# Altium PCB ui-layout-v1.0.0.PcbDoc
Units mil, origin at the board's own origin, x right, y up, seen from the top; angles counter-clockwise.
Board outline 3110 x 1860 mil, 2 copper layers (Top Layer, Bottom Layer); 35 components, 0 nets, 127 pads, 34 vias.
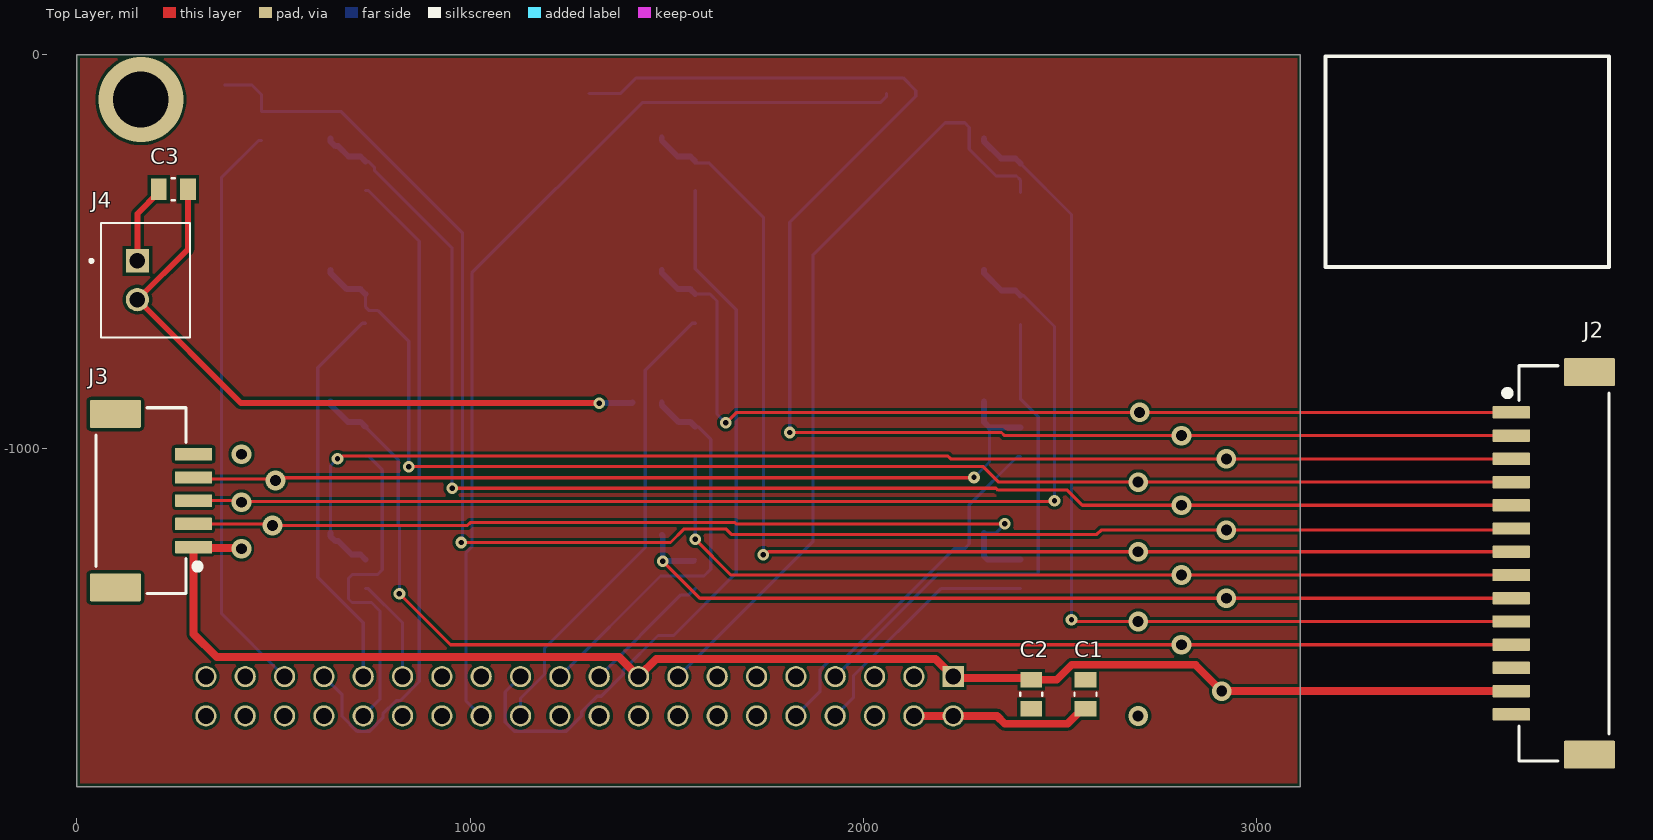
[diagram p0: Top Layer view]
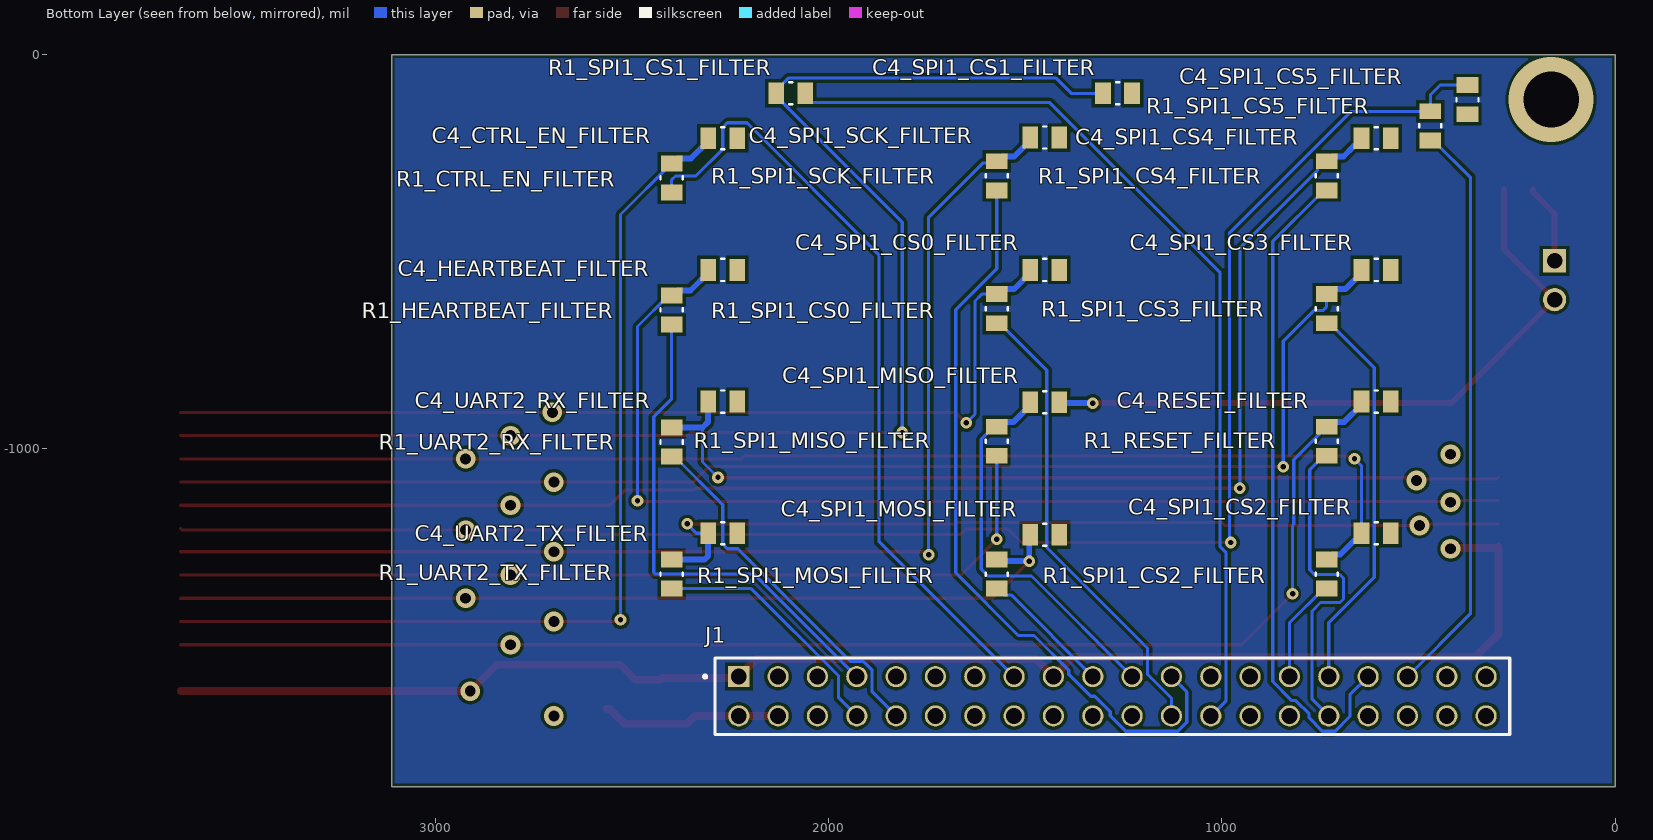
[diagram p1: Bottom Layer view, seen from below]

## Layer stack, top to bottom
Top Solder: solder mask 0.4, Solder Resist, Dk 3.5
Top Layer: signal copper 1.4
Dielectric 1: dielectric 12.6, FR-4, Dk 4.8
Bottom Layer: signal copper 1.4
Bottom Solder: solder mask 0.4, Solder Resist, Dk 3.5

## Board outline
0,-1860 3110,-1860 3110,0 0,0

## Design rules (kind name [scope] priority, off if disabled: settings)
BoardOutlineClearance [All] p1: gap=7.87 ignorepadtopadclearanceinfootprint=FALSE except(15.75: Arc-SplitBarrior Arc-SplitContinuation Track-SplitBarrior Track-SplitContinuation SMDPad-SplitBarrior SMDPad-SplitContinuation THPad-SplitBarrior THPad-SplitContinuation Via-SplitBarrior Via-SplitContinuation Fill-SplitBarrior Fill-SplitContinuation Poly-SplitBarrior Poly-SplitContinuation Region-SplitBarrior Region-SplitContinuation Text-SplitBarrior Text-SplitContinuation)
Clearance "Clearance Bottom Layer" [OnLayer('Bottom Layer')] p1: gap=8 ignorepadtopadclearanceinfootprint=TRUE except(10: Arc-Text Track-Text SMDPad-Text THPad-Text Via-Text Fill-Text Poly-Text Region-Text Text-Text)
Clearance "Clearance Top Layer" [OnLayer('Top Layer')] p2: gap=8 ignorepadtopadclearanceinfootprint=TRUE except(10: Arc-Text Track-Text SMDPad-Text THPad-Text Via-Text Fill-Text Poly-Text Region-Text Text-Text)
Clearance [All] p3: gap=7.87 ignorepadtopadclearanceinfootprint=TRUE except(3.5: Arc-Arc Arc-Track Arc-SMDPad Track-Track Track-SMDPad SMDPad-SMDPad; 5: Arc-Via Track-Via SMDPad-Via THPad-Via Via-Via; 10: Arc-Text Track-Text SMDPad-Text THPad-Text Via-Text Fill-Text Poly-Text Region-Text Text-Text)
HoleSize [All] p1: absolutevalues=TRUE maxlimit=248.03 minlimit=7.87 maxpercent=80.000 minpercent=20.000
MinimumAnnularRing [All] p1: minimumring=3
MinimumSolderMaskSliver [All] p1: minsoldermaskwidth=3.94
PolygonConnect PolygonConnect_1 [All] p1: thpad.connectstyle=Relief thpad.reliefconductorwidth=20 thpad.reliefentries=4 thpad.polygonreliefangle="90 Angle" thpad.airgapwidth=10 smdpad.connectstyle=Relief smdpad.reliefconductorwidth=20 smdpad.reliefentries=4 smdpad.polygonreliefangle="90 Angle" smdpad.airgapwidth=10 via.connectstyle=Direct via.reliefconductorwidth=20 via.reliefentries=4 via.polygonreliefangle="90 Angle" via.airgapwidth=10
RoomDefinition CTRL_EN_FILTER [InComponentClass('CTRL_EN_FILTER')] p1: confinementstyle=ConfineIn formatcopy=TRUE lockcomponents=FALSE outline 1185.04,-3539.37 1440.94,-3539.37 1440.94,-3311.02 1185.04,-3311.02
RoomDefinition SPI1_MISO_FILTER [InComponentClass('SPI1_MISO_FILTER')] p2: confinementstyle=ConfineIn formatcopy=TRUE lockcomponents=FALSE outline 366.14,-4208.66 614.17,-4208.66 614.17,-3980.32 366.14,-3980.32
RoomDefinition SPI1_CS3_FILTER [InComponentClass('SPI1_CS3_FILTER')] p3: confinementstyle=ConfineIn formatcopy=TRUE lockcomponents=FALSE outline -476.38,-3870.08 -224.41,-3870.08 -224.41,-3645.67 -476.38,-3645.67
RoomDefinition SPI1_CS2_FILTER [InComponentClass('SPI1_CS2_FILTER')] p4: confinementstyle=ConfineIn formatcopy=TRUE lockcomponents=FALSE outline -476.38,-4543.31 -224.41,-4543.31 -224.41,-4314.96 -476.38,-4314.96
RoomDefinition SPI1_CS4_FILTER [InComponentClass('SPI1_CS4_FILTER')] p5: confinementstyle=ConfineIn formatcopy=TRUE lockcomponents=FALSE outline -476.38,-3531.5 -224.41,-3531.5 -224.41,-3311.02 -476.38,-3311.02
RoomDefinition HEARTBEAT_FILTER [InComponentClass('HEARTBEAT_FILTER')] p6: confinementstyle=ConfineIn formatcopy=TRUE lockcomponents=FALSE outline 1185.04,-3874.02 1440.94,-3874.02 1440.94,-3645.67 1185.04,-3645.67
RoomDefinition RESET_FILTER [InComponentClass('RESET_FILTER')] p7: confinementstyle=ConfineIn formatcopy=TRUE lockcomponents=FALSE outline -476.38,-4208.66 -224.41,-4208.66 -224.41,-3980.32 -476.38,-3980.32
RoomDefinition SPI1_CS0_FILTER [InComponentClass('SPI1_CS0_FILTER')] p8: confinementstyle=ConfineIn formatcopy=TRUE lockcomponents=FALSE outline 366.14,-3870.08 614.17,-3870.08 614.17,-3645.67 366.14,-3645.67
RoomDefinition U_power [InComponentClass('U_power')] p9: confinementstyle=ConfineIn formatcopy=TRUE lockcomponents=FALSE outline -996.06,-4559.06 -637.8,-4559.06 -637.8,-3440.94 -996.06,-3440.94
RoomDefinition SPI1_MOSI_FILTER [InComponentClass('SPI1_MOSI_FILTER')] p10: confinementstyle=ConfineIn formatcopy=TRUE lockcomponents=FALSE outline 366.14,-4543.31 614.17,-4543.31 614.17,-4318.9 366.14,-4318.9
RoomDefinition SPI1_SCK_FILTER [InComponentClass('SPI1_SCK_FILTER')] p11: confinementstyle=ConfineIn formatcopy=TRUE lockcomponents=FALSE outline 366.14,-3531.5 614.17,-3531.5 614.17,-3307.09 366.14,-3307.09
RoomDefinition U_jetson-nano [InComponentClass('U_jetson-nano')] p12: confinementstyle=ConfineIn formatcopy=TRUE lockcomponents=FALSE outline -759.84,-4897.64 1606.3,-4897.64 1606.3,-4657.48 -759.84,-4657.48
RoomDefinition U_motordriver [InComponentClass('U_motordriver')] p13: confinementstyle=ConfineIn formatcopy=TRUE lockcomponents=FALSE outline 2572.68,-4982.44 2572.68,-3895.51 2927.32,-3895.51 2927.32,-4982.44
RoomDefinition SPI1_CS1_FILTER [InComponentClass('SPI1_CS1_FILTER')] p14: confinementstyle=ConfineIn formatcopy=TRUE lockcomponents=FALSE outline 181.1,-3291.34 1169.29,-3291.34 1169.29,-3196.85 181.1,-3196.85
RoomDefinition SPI1_CS5_FILTER [InComponentClass('SPI1_CS5_FILTER')] p15: confinementstyle=ConfineIn formatcopy=TRUE lockcomponents=FALSE outline -677.17,-3405.51 -488.19,-3405.51 -488.19,-3181.1 -677.17,-3181.1
RoomDefinition UART2_TX_FILTER [InComponentClass('UART2_TX_FILTER')] p16: confinementstyle=ConfineIn formatcopy=TRUE lockcomponents=FALSE outline 1185.04,-4543.31 1440.94,-4543.31 1440.94,-4314.96 1185.04,-4314.96
RoomDefinition UART2_RX_FILTER [InComponentClass('UART2_RX_FILTER')] p17: confinementstyle=ConfineIn formatcopy=TRUE lockcomponents=FALSE outline 1185.04,-4208.66 1440.94,-4208.66 1440.94,-3980.32 1185.04,-3980.32
RoutingCorners [All] p1: cornerstyle=Round minsetback=100 maxsetback=100
RoutingVias [All] p1: holewidth=19.68 width=39.37 viastyle="Through Hole" minholewidth=7.87 minwidth=17.72 maxholewidth=39.37 maxwidth=78.74
SilkToSilkClearance [All] p1: silktosilkclearance=3.94
SilkToSolderMaskClearance [IsPad] p1: minsilkscreentomaskgap=3.94 clearancetoexposedcopper=TRUE
SolderMaskExpansion [All] p1: expansion=4 istentingtop=FALSE
Width [All] p1: maxlimit=100 minlimit=3.5 preferedwidth=15
25 further rules are at their usual default settings.

## Components (designator, comment, footprint, x,y, rotation, side; value= is the part's Value field where it differs from the comment)
C1 "0.1uF 25V" 0805 2564.06,-1625.35 r270 top value=0.1uF
C2 "0.1uF 25V" 0805 2426.26,-1625.35 r90 top value=0.1uF
C3 "0.1uF 25V" 0805 245.16,-341.89 r180 top value=0.1uF
C4_CTRL_EN_FILTER "100pF 16V" 0805 2268.78,-211.97 r0 bottom value=100pF (schematic designator C4)
C4_HEARTBEAT_FILTER "100pF 16V" 0805 2268.78,-546.62 r0 bottom value=100pF (schematic designator C4)
C4_RESET_FILTER "100pF 16V" 0805 607.36,-881.26 r0 bottom value=100pF (schematic designator C4)
C4_SPI1_CS0_FILTER "100pF 16V" 0805 1449.88,-546.61 r0 bottom value=100pF (schematic designator C4)
C4_SPI1_CS1_FILTER "100pF 16V" 0805 1264.84,-97.8 r0 bottom value=100pF (schematic designator C4)
C4_SPI1_CS2_FILTER "100pF 16V" 0805 607.36,-1215.91 r0 bottom value=100pF (schematic designator C4)
C4_SPI1_CS3_FILTER "100pF 16V" 0805 607.36,-546.61 r0 bottom value=100pF (schematic designator C4)
C4_SPI1_CS4_FILTER "100pF 16V" 0805 607.36,-211.97 r0 bottom value=100pF (schematic designator C4)
C4_SPI1_CS5_FILTER "100pF 16V" 0805 375.08,-113.54 r90 bottom value=100pF (schematic designator C4)
C4_SPI1_MISO_FILTER "100pF 16V" 0805 1449.88,-883.23 r0 bottom value=100pF (schematic designator C4)
C4_SPI1_MOSI_FILTER "100pF 16V" 0805 1449.88,-1219.84 r0 bottom value=100pF (schematic designator C4)
C4_SPI1_SCK_FILTER "100pF 16V" 0805 1449.88,-210 r0 bottom value=100pF (schematic designator C4)
C4_UART2_RX_FILTER "100pF 16V" 0805 2268.78,-881.26 r0 bottom value=100pF (schematic designator C4)
C4_UART2_TX_FILTER "100pF 16V" 0805 2268.78,-1215.91 r0 bottom value=100pF (schematic designator C4)
J1 "CN HDR 40POS" "CN HDR 40POS 0.1 TH" 1277.83,-1630.47 r0 bottom locked
J2 "CN HDR 14POS" "CN HDR 14POS SMD 1.5MM" 3755,-1292.68 r90 top
J3 "CN HDR 5POS" "CN HDR 5POS SMD 1.5MM" 188.32,-1133.23 r270 top
J4 "CN HDR 2POS JST XH" JST_B2B-XH-A(LF)(SN) 174.48,-572.78 r270 top
R1_CTRL_EN_FILTER "160" 0805 2398.7,-312.76 r270 bottom value=1 (schematic designator R1)
R1_HEARTBEAT_FILTER "160" 0805 2398.7,-648.42 r270 bottom value=1 (schematic designator R1)
R1_RESET_FILTER "160" 0805 733.35,-982.35 r270 bottom value=1 (schematic designator R1)
R1_SPI1_CS0_FILTER "160" 0805 1571.93,-644.99 r270 bottom value=1 (schematic designator R1)
R1_SPI1_CS1_FILTER "160" 0805 2095.55,-97.8 r180 bottom value=1 (schematic designator R1)
R1_SPI1_CS2_FILTER "160" 0805 733.35,-1319.72 r270 bottom value=1 (schematic designator R1)
R1_SPI1_CS3_FILTER "160" 0805 733.35,-644.98 r270 bottom value=1 (schematic designator R1)
R1_SPI1_CS4_FILTER "160" 0805 733.35,-307.61 r270 bottom value=1 (schematic designator R1)
R1_SPI1_CS5_FILTER "160" 0805 469.57,-180.47 r270 bottom value=1 (schematic designator R1)
R1_SPI1_MISO_FILTER "160" 0805 1571.93,-982.35 r270 bottom value=1 (schematic designator R1)
R1_SPI1_MOSI_FILTER "160" 0805 1571.93,-1319.72 r270 bottom value=1 (schematic designator R1)
R1_SPI1_SCK_FILTER "160" 0805 1571.93,-307.61 r270 bottom value=1 (schematic designator R1)
R1_UART2_RX_FILTER "160" 0805 2398.7,-984.07 r270 bottom value=1 (schematic designator R1)
R1_UART2_TX_FILTER "160" 0805 2398.7,-1319.72 r270 bottom value=1 (schematic designator R1)

## Footprints (in the part's own frame and the unit in brackets; to place one, negate y for a bottom-side part, rotate by r counter-clockwise, add the part's x,y. Pads: shape width x height; smd on the part's side, far side on the other; paste and mask are expansions set on the pad)
0805 [mil]
  rect 40x55 smd: 1(-37,0) 2(37,0)
  silkscreen extent -4,-28 4,28, body extent -47,-28 47,28, height 24
"CN HDR 5POS SMD 1.5MM" [mm] "Connector Header Surface Mount 5 position 0.059\" (1.50mm)"
  rrect10% 1.8x3.3 smd: 0(-5.6,-2.3) 0(5.6,-2.3)
  rrect10% 0.8x2.4 smd: 1(3,2.75) 2(1.5,2.75) 3(0,2.75) 4(-1.5,2.75) 5(-3,2.75)
  silkscreen extent -6,-3.55 6,3, body extent -6,-2.9 6,4.1, height 7.51
"CN HDR 14POS SMD 1.5MM" [mm] "Connector Header Surface Mount 14 position 0.059\" (1.50mm)"
  rrect10% 1.8x3.3 smd: 0(-12.35,-2.3) 0(12.35,-2.3)
  rrect10% 0.8x2.4 smd: 1(9.75,2.75) 2(8.25,2.75) 3(6.75,2.75) 4(5.25,2.75) 5(3.75,2.75) 6(2.25,2.75) 7(0.75,2.75) 8(-0.75,2.75) 9(-2.25,2.75) 10(-3.75,2.75) 11(-5.25,2.75) 12(-6.75,2.75) 13(-8.25,2.75) 14(-9.75,2.75)
  silkscreen extent -12.75,-3.55 12.76,3
"CN HDR 40POS 0.1 TH" [mm] "40 Position Header Connector 0.100\" (2.54mm) Through Hole"
  rect 1.37x1.37 hole 1.02: 01(24.13,-1.27)
  round 1.37 hole 1.02: 02(24.13,1.27) 03(21.59,-1.27) 04(21.59,1.27) 05(19.05,-1.27) 06(19.05,1.27) 07(16.51,-1.27) 08(16.51,1.27) 09(13.97,-1.27) 10(13.97,1.27) 11(11.43,-1.27) 12(11.43,1.27) 13(8.89,-1.27) 14(8.89,1.27) 15(6.35,-1.27) 16(6.35,1.27) 17(3.81,-1.27) 18(3.81,1.27) 19(1.27,-1.27) 20(1.27,1.27) 21(-1.27,-1.27) 22(-1.27,1.27) 23(-3.81,-1.27) 24(-3.81,1.27) 25(-6.35,-1.27) 26(-6.35,1.27) 27(-8.89,-1.27) 28(-8.89,1.27) 29(-11.43,-1.27) 30(-11.43,1.27) 31(-13.97,-1.27) 32(-13.97,1.27) 33(-16.51,-1.27) 34(-16.51,1.27) 35(-19.05,-1.27) 36(-19.05,1.27) 37(-21.59,-1.27) 38(-21.59,1.27) 39(-24.13,-1.27) 40(-24.13,1.27)
  silkscreen extent -25.65,-2.48 26.4,2.47
JST_B2B-XH-A(LF)(SN) [mm]
  rect 1.508x1.508 hole 1: 1(-1.25,-0.525)
  round 1.508 hole 1: 2(1.25,-0.525)
  silkscreen extent -3.7,-3.6 3.7,2.88, body extent -3.7,-2.85 3.7,2.9, height 7.1

## Part data
C1 C2 C3: library part "CAP 0.1uF 25V", "Default Symbol for Capacitors", Operating Temperature="-55°C ~ 125°C", Rating=25V, Temperature Coefficient=X7R, Tolerance=10%, Part Number="CAP 0.1uF 25V"
C4_CTRL_EN_FILTER C4_HEARTBEAT_FILTER C4_RESET_FILTER C4_SPI1_CS0_FILTER C4_SPI1_CS1_FILTER C4_SPI1_CS2_FILTER C4_SPI1_CS3_FILTER C4_SPI1_CS4_FILTER C4_SPI1_CS5_FILTER C4_SPI1_MISO_FILTER C4_SPI1_MOSI_FILTER C4_SPI1_SCK_FILTER C4_UART2_RX_FILTER C4_UART2_TX_FILTER: library part "CAP 100pF 16V", "Default Symbol for Capacitors", Operating Temperature="-55°C ~ 125°C", Rating=16V, Temperature Coefficient=X5R, Tolerance=10%, Part Number="CAP 100pF 16V"
J1: "40 Position Header Connector", Supplier Part Number 1=S6104-ND, Part Number="CN HDR 40POS", Pin Count=40, Supplier 1=Digi-Key, Supplier URL 1=https://www.digikey.ca/en/products/detail/sullins-connector-solutions/PPTC202LFBN-RC/807240?s=N4IgTCBcDaIMoDYCMAGALAWgHIBEQF0BfIA
J2: "Connector Header 14 Position", Supplier Part Number 1=455-4210-1-ND, Part Number="CN HDR 14POS", Pin Count=14, Supplier 1=Digi-Key, Supplier URL 1=https://www.digikey.ca/en/products/detail/jst-sales-america-inc/BM14B-ZESS-TBT-LF-SN/1886998?s=N4IgTCBcDaICwFYEFo5gIwAZnuQOQBEQBdAXyA
J3: "Connector Header 5 Position", Supplier Part Number 1=455-2383-1-ND, Part Number="CN HDR 5POS", Pin Count=5, Supplier 1=Digi-Key, Supplier URL 1=https://www.digikey.ca/en/products/detail/jst-sales-america-inc/BM05B-ZESS-TBT-LF-SN/1886989?s=N4IgTCBcDaICwFYEFowGYAcbkEZkDkAREAXQF8g
J4: "Connector Header Through Hole 2 position 0.098 _2.50mm_ / JST XH", Package=None, MF="JST Sales", MP=B2B-XH-A_LF__SN_, Part Number="CN HDR 2POS JST XH", Pin Count=2, Price=None, SnapEDA_Link=https://www.snapeda.com/parts/B2B-XH-A%28LF%29%28SN%29/JST%20Sales%20America%20Inc./view-part/492310/?ref=snap
R1_CTRL_EN_FILTER R1_HEARTBEAT_FILTER R1_RESET_FILTER R1_SPI1_CS0_FILTER R1_SPI1_CS1_FILTER R1_SPI1_CS2_FILTER R1_SPI1_CS3_FILTER R1_SPI1_CS4_FILTER R1_SPI1_CS5_FILTER R1_SPI1_MISO_FILTER R1_SPI1_MOSI_FILTER R1_SPI1_SCK_FILTER R1_UART2_RX_FILTER R1_UART2_TX_FILTER: library part "RES 160.0 1/8W", "Default Resistor Symbol", Package=0805, Power (Watts)=0.125W, Tolerance=5%, Part Number="RES 160.0 1/8W"

## Via types
v1: diameter 50, hole 27.56, Top Layer to Bottom Layer, 18 vias
v2: diameter 29.53, hole 13.78, Top Layer to Bottom Layer, 15 vias
v3: diameter 216.54, hole 141.73, Top Layer to Bottom Layer, 1 vias

## Nets (pads, with @x,y where several pads share a name; then routed paths per layer and width w, separated by ;. In a path a pad name is that pad's centre, name@x,y a point inside that pad or via, vN(x,y) a via of type N, cw(c..) or ccw(c..) an arc to the next point about the centre after c; other vN are vias at no path point)
pads on no net: C1.1 C1.2 C2.1 C2.2 C3.1 C3.2 C4_CTRL_EN_FILTER.1 C4_CTRL_EN_FILTER.2 C4_HEARTBEAT_FILTER.1 C4_HEARTBEAT_FILTER.2 C4_RESET_FILTER.1 C4_RESET_FILTER.2 C4_SPI1_CS0_FILTER.1 C4_SPI1_CS0_FILTER.2 C4_SPI1_CS1_FILTER.1 C4_SPI1_CS1_FILTER.2 C4_SPI1_CS2_FILTER.1 C4_SPI1_CS2_FILTER.2 C4_SPI1_CS3_FILTER.1 C4_SPI1_CS3_FILTER.2 C4_SPI1_CS4_FILTER.1 C4_SPI1_CS4_FILTER.2 C4_SPI1_CS5_FILTER.1 C4_SPI1_CS5_FILTER.2 C4_SPI1_MISO_FILTER.1 C4_SPI1_MISO_FILTER.2 C4_SPI1_MOSI_FILTER.1 C4_SPI1_MOSI_FILTER.2 C4_SPI1_SCK_FILTER.1 C4_SPI1_SCK_FILTER.2 C4_UART2_RX_FILTER.1 C4_UART2_RX_FILTER.2 C4_UART2_TX_FILTER.1 C4_UART2_TX_FILTER.2 J1.01 J1.02 J1.03 J1.04 J1.05 J1.06 J1.07 J1.08 J1.09 J1.10 J1.11 J1.12 J1.13 J1.14 J1.15 J1.16 J1.17 J1.18 J1.19 J1.20 J1.21 J1.22 J1.23 J1.24 J1.25 J1.26 J1.27 J1.28 J1.29 J1.30 J1.31 J1.32 J1.33 J1.34 J1.35 J1.36 J1.37 J1.38 J1.39 J1.40 J2.0 J2.1 J2.2 J2.3 J2.4 J2.5 J2.6 J2.7 J2.8 J2.9 J2.10 J2.11 J2.12 J2.13 J2.14 J3.0 J3.1 J3.2 J3.3 J3.4 J3.5 J4.1 J4.2 R1_CTRL_EN_FILTER.1 R1_CTRL_EN_FILTER.2 R1_HEARTBEAT_FILTER.1 R1_HEARTBEAT_FILTER.2 R1_RESET_FILTER.1 R1_RESET_FILTER.2 R1_SPI1_CS0_FILTER.1 R1_SPI1_CS0_FILTER.2 R1_SPI1_CS1_FILTER.1 R1_SPI1_CS1_FILTER.2 R1_SPI1_CS2_FILTER.1 R1_SPI1_CS2_FILTER.2 R1_SPI1_CS3_FILTER.1 R1_SPI1_CS3_FILTER.2 R1_SPI1_CS4_FILTER.1 R1_SPI1_CS4_FILTER.2 R1_SPI1_CS5_FILTER.1 R1_SPI1_CS5_FILTER.2 R1_SPI1_MISO_FILTER.1 R1_SPI1_MISO_FILTER.2 R1_SPI1_MOSI_FILTER.1 R1_SPI1_MOSI_FILTER.2 R1_SPI1_SCK_FILTER.1 R1_SPI1_SCK_FILTER.2 R1_UART2_RX_FILTER.1 R1_UART2_RX_FILTER.2 R1_UART2_TX_FILTER.1 R1_UART2_TX_FILTER.2
copper on no net: | length 65281.8
  Top Layer w8: 296.6,-1192.28 493.19,-1192.28 v1(497.13,-1196.22) 992.39,-1196.22 999.72,-1188.89 1672.86,-1188.89 1676.25,-1192.28 v2(2359.33,-1192.28) ; 296.6,-1133.23 414.45,-1133.23 v1(418.39,-1137.17) 420.35,-1135.2 2483.35,-1135.2 v2(2485.32,-1133.23) ; 296.6,-1074.18 300.53,-1078.11 501.06,-1078.11 v1(505,-1082.05) 512.08,-1074.97 2279.8,-1074.97 v2(2280.59,-1074.17) ; v2(662.48,-1026.93) 668.31,-1026.93 675.38,-1019.85 2214.45,-1019.85 2221.53,-1026.93 v1(2922.32,-1026.93) 3646.73,-1026.93 ; v2(819.96,-1369.45) 949.88,-1499.37 v1(2808.15,-1499.37) 3646.73,-1499.37 ; v2(843.58,-1046.61) 2304.21,-1046.61 2343.58,-1085.98 v1(2697.91,-1085.98) 3646.73,-1085.98 ; v2(953.82,-1101.73) 2336.7,-1101.73 2341.44,-1106.46 2517.61,-1106.46 2556.18,-1145.04 3646.73,-1145.04 ; v2(977.44,-1239.53) 1508.94,-1239.53 1543.57,-1204.89 1649.59,-1204.89 1663.75,-1219.05 2592.85,-1219.05 2603.87,-1208.03 3642.8,-1208.03 3646.73,-1204.09 ; v2(1489.25,-1286.77) 1583.74,-1381.26 v1(2922.32,-1381.26) 3646.73,-1381.26 ; v2(1571.93,-1231.65) 1662.48,-1322.2 3646.73,-1322.2 ; v2(1649.41,-935.12) 1650.73,-935.12 1677.03,-908.82 v1(2701.85,-908.82) 3646.73,-908.82 ; v2(1745.16,-1271.02) 1750.98,-1271.02 1758.86,-1263.15 v1@2693.98,-1263.15 ; v2(1812.09,-960) 2350.57,-960 2358.45,-967.87 v1(2808.15,-967.87) 3646.73,-967.87 ; v2(2528.62,-1436.38) 2532.56,-1440.32 v1(2697.91,-1440.32) 3646.73,-1440.32 ; v1(2697.91,-1263.15) 3646.73,-1263.15
  Top Layer w15: 153.82,-523.57 153.82,-403.73 208.16,-349.39 208.16,-341.89 ; 282.16,-341.89 282.16,-493.65 153.82,-622 417.02,-885.2 v2(1327.83,-885.2)
  Top Layer w20: v1(418.39,-1255.28) 416.42,-1253.31 298.56,-1253.31 296.6,-1251.34 296.6,-1472.07 355.39,-1530.87 1378.23,-1530.87 1427.83,-1580.47 1472.8,-1535.5 2182.87,-1535.5 2227.83,-1580.47 2231.78,-1584.41 2422.32,-1584.41 2426.26,-1588.35 2491.1,-1588.35 2529.1,-1550.35 2843.39,-1550.35 v1(2910.51,-1617.48) 3646.73,-1617.48 ; 2127.83,-1680.47 2227.83,-1680.47 2339.18,-1680.47 2359.06,-1700.35 2518.56,-1700.35 2556.56,-1662.35 2564.06,-1662.35
  Bottom Layer w8: 375.08,-76.54 444.38,-76.54 469.57,-101.73 469.57,-143.47 670.67,-143.47 980.58,-453.38 980.58,-1236.39 v2(977.44,-1239.53) ; 469.57,-217.47 462.07,-217.47 367.2,-312.33 367.2,-1419.84 527.83,-1580.47 ; 627.83,-1580.47 674.16,-1626.8 674.16,-1681.91 711.69,-1719.44 743.98,-1719.44 777.83,-1685.58 777.83,-1675.36 811.69,-1641.5 821.91,-1641.5 870.35,-1593.07 870.35,-474.12 740.85,-344.61 733.35,-344.61 ; 644.36,-1215.9 644.36,-1045.05 v2(662.48,-1026.93) ; 727.83,-1680.47 770.3,-1638 770.3,-1413.76 748.77,-1392.22 699.43,-1392.22 690.35,-1383.15 690.35,-1330.3 699.43,-1321.22 764.27,-1321.22 776.35,-1309.15 776.35,-1054.85 740.85,-1019.35 733.35,-1019.35 ; 727.83,-1580.47 727.83,-1443.26 612.36,-1327.79 612.36,-795.47 725.85,-681.98 733.35,-681.98 ; 733.35,-1356.72 740.85,-1356.72 827.83,-1443.71 827.83,-1580.47 ; 733.35,-945.35 816.82,-1028.83 816.82,-1192.6 819.96,-1195.74 v2(819.96,-1369.45) ; 733.35,-607.98 733.35,-639.98 743.35,-649.98 765.82,-649.98 843.58,-727.75 v2(843.58,-1046.61) ; 733.35,-270.61 740.85,-270.61 756.85,-286.61 756.85,-294.11 953.82,-491.09 v2(953.82,-1101.73) ; 1027.83,-1680.47 988.87,-1641.5 988.87,-1265.95 1004.2,-1250.61 1004.2,-554.21 1437.12,-121.29 2042.55,-121.29 2058.55,-105.29 2058.55,-97.79 ; 1127.83,-1680.47 1127.83,-1635.58 1188.87,-1574.55 1188.87,-1508.33 1444.88,-1252.31 1444.88,-801.53 1564.43,-681.98 1571.93,-681.98 ; 1127.83,-1580.47 1088.87,-1619.44 1088.87,-1696.61 1111.69,-1719.44 1243.98,-1719.44 1283.35,-1680.07 1283.35,-1669.85 1322.72,-1630.47 1332.94,-1630.47 1388.87,-1574.55 1388.87,-1564.33 1477.15,-1476.05 1517.08,-1476.05 1676.18,-1316.95 1676.18,-647.76 1571.93,-543.51 1571.93,-344.61 ; 1227.83,-1580.47 1483.58,-1324.72 1594.4,-1324.72 1611.43,-1307.7 1611.43,-977.35 1579.43,-945.35 1571.93,-945.35 ; 1301.84,-97.79 1382.95,-97.79 1422.45,-58.29 2100.55,-58.29 2132.55,-90.29 2132.55,-97.79 2132.55,-105.29 1812.09,-425.76 v2(1812.09,-960) ; 1327.83,-1580.47 1535.58,-1372.72 1555.93,-1372.72 1571.93,-1356.72 ; 1527.83,-1580.47 1871.72,-1236.59 1871.72,-507.56 2206.81,-172.47 2256.75,-172.47 2268.78,-184.5 2268.78,-239.44 2337.11,-307.76 2388.7,-307.76 2398.7,-317.76 2398.7,-349.76 ; 1567.88,-1286.77 1571.93,-1282.72 ; v2(1571.93,-1231.65) 1571.93,-1019.36 ; 1571.93,-607.98 1609.68,-607.98 1627.43,-625.74 1627.43,-913.14 v2(1649.41,-935.12) ; 1571.93,-270.61 1575.65,-274.34 1606.74,-274.34 1745.16,-412.76 v2(1745.16,-1271.02) ; 1827.83,-1680.47 1888.87,-1619.44 1888.87,-1564.33 1911.69,-1541.5 1944.18,-1541.5 2230.27,-1255.41 2256.75,-1255.41 2268.78,-1243.38 2268.78,-1143.49 2391.2,-1021.07 2398.7,-1021.07 ; 1927.83,-1680.47 1974.16,-1634.15 1974.16,-1579.04 2196.47,-1356.72 2398.7,-1356.72 ; 1927.83,-1580.47 2188.27,-1320.04 2439.51,-1320.04 2444.2,-1315.35 2444.2,-919.61 2398.7,-874.12 2398.7,-685.42 ; v2(2280.59,-1074.17) 2319.96,-1034.8 2319.96,-947.07 ; 2305.78,-1215.91 2335.71,-1215.91 v2(2359.33,-1192.28) ; 2398.7,-611.42 2406.2,-611.42 2485.32,-690.53 v2(2485.32,-1133.23) ; 2398.7,-275.76 2528.62,-405.69 v2(2528.62,-1436.38)
  Bottom Layer w15: 644.36,-1215.9 644.36,-1223.4 656.86,-1235.9 664.36,-1235.9 698.68,-1270.22 720.85,-1270.22 733.35,-1282.72 ; 644.36,-881.26 644.36,-888.76 688.46,-932.85 720.85,-932.85 733.35,-945.35 ; 644.36,-546.61 644.36,-554.11 685.73,-595.48 720.85,-595.48 733.35,-607.98 ; 644.36,-211.97 644.36,-219.47 656.86,-231.97 664.36,-231.97 690.51,-258.11 720.85,-258.11 733.35,-270.61 ; v2(1327.83,-885.2) 1410.91,-885.2 1412.88,-883.23 ; 1486.88,-1219.84 1489.25,-1222.21 v2(1489.25,-1286.77) 1567.88,-1286.77 ; 1486.88,-883.23 1486.88,-890.73 1529.01,-932.85 1559.43,-932.85 1571.93,-945.35 ; 1486.88,-546.61 1486.88,-554.11 1528.25,-595.48 1559.43,-595.48 1571.93,-607.98 ; 1486.88,-210 1486.88,-217.5 1527.5,-258.11 1559.43,-258.11 1571.93,-270.61 ; 2305.78,-1215.91 2305.78,-1273.94 2314.57,-1282.72 2398.7,-1282.72 ; 2305.78,-881.26 2305.78,-932.89 2319.96,-947.07 2398.7,-947.07 ; 2305.78,-546.61 2305.78,-554.11 2350.58,-598.92 2386.2,-598.92 2398.7,-611.42 ; 2305.78,-211.97 2305.78,-219.47 2349.58,-263.26 2386.2,-263.26 2398.7,-275.76
  other v1: 2697.91,-1680.47 2808.15,-1322.2 2922.32,-1208.03 2808.15,-1145.04 418.39,-1015.12
  other v3: 162.48,-113.54

## Polygon pours and split planes (outlines as drawn)
no net on Bottom Layer "NONET_L02_P003" (solid, pour order 3): 5,-1853.7 5,512.44 3945.94,512.44 3945.94,-1853.7
no net on Top Layer "NONET_L01_P002" (solid, pour order 2): 5,-1853.7 5,0 3110,0 3110,-1860

## Silkscreen, mask and mechanical layers (free items; w line width, h text height)
Top Overlay:
  lines w10: 3174.29,-538.74 3174.29,-3.31 3894.76,-3.31 3894.76,-538.74 3174.29,-538.74
Mechanical 1:
  lines w10: 5,-1853.7 5,36.06 3105,36.06 3105,-1853.7 5,-1853.7